# Altium PCB PCI Express_16765X11115_36PIN_Half length.PCBDOC (part 2 of 2)
Units mil, origin at the board's own origin, x right, y up, seen from the top; angles counter-clockwise.
Board outline 6725.36 x 2712.6 mil, 4 copper layers (TopLayer, InternalPlane1, InternalPlane2, BottomLayer); 107 components, 103 nets, 466 pads, 237 vias.
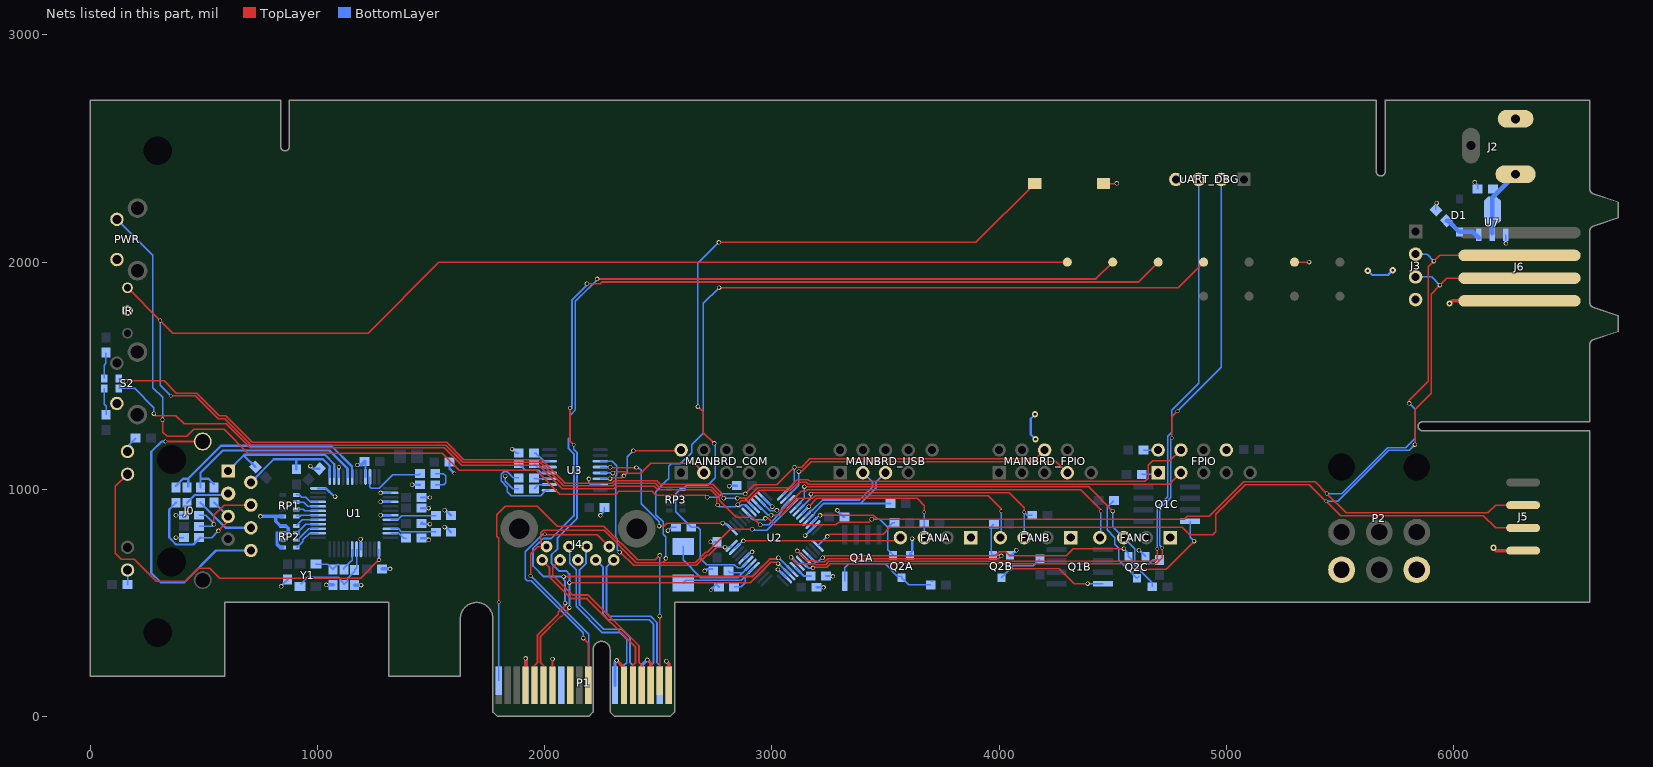
[diagram p4: the nets of this part, all layers, seen from the top]

## Via types
v1: diameter 19.68, hole 13.78, TopLayer to BottomLayer, tented both sides, 173 vias
v2: diameter 15.75, hole 11.81, TopLayer to BottomLayer, tented both sides, 33 vias
v3: diameter 29.53, hole 13.78, TopLayer to BottomLayer, tented both sides, 14 vias
v4: diameter 27.56, hole 11.81, TopLayer to BottomLayer, tented both sides, 8 vias
v5: diameter 27.56, hole 13.78, TopLayer to BottomLayer, tented both sides, 7 vias
v6: diameter 31.5, hole 13.78, TopLayer to BottomLayer, tented both sides, 1 vias
v7: diameter 23.62, hole 11.81, TopLayer to BottomLayer, tented both sides, 1 vias

## Nets (pads, with @x,y where several pads share a name; then routed paths per layer and width w, separated by ;. In a path a pad name is that pad's centre, name@x,y a point inside that pad or via, vN(x,y) a via of type N, cw(c..) or ccw(c..) an arc to the next point about the centre after c; other vN are vias at no path point) (continued)
GND: C3.1 C4.1 C5.1 C6.1 C8.2 C9.1 C11.1 C12.1 C13.1 C14.1 C15.1 C16.1 C17.1 C18.1 C19.1 C20.1 C21.1 C22.1 C24.1 C26.2 C27.2 C30.1 C34.1 C35.1 C36.1 C37.1 FANA.1 FANB.1 FANC.1 FPIO.8 IR.2 J2.2 J3.4 J4.7 J5.4 J6.4 P1.A4 P1.A12 P1.A15 P1.A18 P1.B4 P1.B7 P1.B13 P1.B16 P1.B18 P2.4 P2.6 PWR.2 Q2A.2 Q2B.2 Q2C.2 R8.2 R14.2 R15.2 RP1.5 RP2.5 RP2.6 RP2.7 RP2.8 S1.2 S2.2 TGND.1 U1.3 U1.9 U1.14 U1.16 U1.19 U1.29 U1.48 U2.8 U2.23 U2.35 U2.47 U3.15 U7.1 UART_DBG.4 | length 4029.6
  TopLayer w6: S1.2@4459.23,2345.94 4516.65,2345.94 v1(4517.65,2346.94) ; TGND.1@5300,2000 v1(5364,2000)
  TopLayer w10: P1.B7@2033.46,137.8 2033.46,252.46 v1(2034,253)
  TopLayer w15: P1.B4@1915.35,137.8 v1(1915.35,255.91) ; v1(2316,247) 2348.43,214.57 P1.B13@2348.43,137.8 ; v1(2451,249) 2466.54,233.46 P1.B16@2466.54,137.8 ; v1(2535,243) 2545.28,232.72 P1.B18@2545.28,137.8 ; v5(5982.38,1817.68) 5995.38,1830.68 J6.4@6070,1830.68 ; v5(6176,743) 6189,730 J5.4@6306.62,730
  BottomLayer w6: v1(375.76,787.4) C3.1@411.19,787.4 ; v1(375.76,885.83) C4.1@411.19,885.83 ; v1(1826,1058) 1826,1035 1859,1002 C34.1@1885.54,1002 ; v1(1856,1177) 1874,1159 C35.1@1885.54,1159 ; v1(2194,1046) 2194,1029 2201.98,1021.02 U3.15@2244.2,1021.02 ; v1(2245,885) 2262.46,902.46 C36.1@2262.46,920 ; v1(2542,818) 2557,833 C26.2@2577.54,833 ; v4@4156.22,1220 v4(4160,1220) ; v4@5733,1960.22 v4(5733,1964) ; C37.1@5922.34,2229.66 5922.34,2256.2 v1(5925.8,2259.66) ; v1(6093.65,2350.79) 6106.18,2338.25 C30.1@6106.18,2321.79 ; U7.1@6229.7,2119.92 6229.7,2083.73 v1(6230.65,2082.79)
  BottomLayer w10: v1(840,573) 840,575.54 C27.2@868,603.54 ; v1(968,1102) 979.34,1090.66 C19.1@1007.66,1090.66 ; U1.48@1001.97,1003.94 1037.06,1003.94 1073,968 v1(1077,968) ; U1.3@1092.52,1055.12 1092.52,1096.52 v1(1094,1098) ; v1(1189,780) 1189,739.11 1188.58,738.69 1191,736.28 U1.29@1190.94,736.22 ; C24.1@1206.69,1122.05 1210.63,1118.11 U1.9@1210.63,1055.12 ; v1(1277,886) 1320.69,886 U1.19@1320.87,885.83 ; v1(1277,945.06) U1.16@1320.69,945.06 ; v1(1277,984.43) U1.14@1320.69,984.43 ; v1(1416,1020) R15.2@1450.54,1020 ; R14.2@1456.46,785 1485,785 1489,781 v1(1489,777) ; C20.1@1456.46,849 1460.46,853 1466.46,847 v1(1494,847) ; C22.1@1456.46,917 v1(1488,917) ; C21.1@1456.46,964 v1(1494,964) ; v1(1559,834) 1564.46,834 C14.1@1587.46,811 ; v1(1559,908) 1564.46,908 C13.1@1587.46,885 ; C18.1@1580.46,1120 1580.46,1091.54 v2(1602,1070) ; v1(2704,641) 2708,641 2716,649 C8.2@2738.54,649 ; v1(2730,769) 2731.54,767.46 C12.1@2757,767.46 ; v2(2731,556) 2731,558.46 2754.54,582 C9.1@2766.54,570 ; v1(2812,1014) 2814,1016 C11.1@2844.54,1016 ; U2.8@2878.18,695.53 2878.18,696.18 2906.24,724.24 v1(2912.56,724.24) ; U2.23@2961.7,962.79 3000.49,924 v1(3001,924) ; v1(3026,647) 3026.94,647 U2.47@3061.92,612.02 ; v1(3146,796) 3146,796.32 U2.35@3187.2,837.51 ; C5.1@3195.46,569 3226,569 v1(3227,568) ; R8.2@3237.46,618 3267,618 v1(3268,617) ; v1(3288,907) 3288,905 3314,879 C6.1@3318.46,879 ; Q2A.2@3607.72,710.17 3614.53,710.17 3607.7,717 3617,726.3 v1(3617,783) ; Q2B.2@4047.41,710.22 4054.22,710.22 v1(4076.01,732.01) ; v4(4158,1330) 4139,1311 4139,1241 v4(4160,1220) ; v1(4615,732) 4617.61,732 Q2C.2@4643.4,706.21 ; v4(5623,1962) 5642,1943 5712,1943 v4(5733,1964)
  BottomLayer w15: v1(748,881) 748.24,880.76 816,880.76 ; RP2.5@846.47,744.76 834.24,744.76 821,758 821,776 ; RP2.6@846.47,776.25 846.22,776 821,776 ; RP1.5@846.47,880.76 816,880.76 ; v1(1038,579) 1038.54,579.54 C16.1@1068,579.54 ; C15.1@1163,578.54 1190.46,578.54 v1(1191,578) ; v1(1174,1107) 1191.65,1107 C24.1@1207.65,1123 ; C17.1@1283.46,649.61 v1(1318.9,649.61) ; P1.A4@1915.35,137.8 v1(1915.35,255.91) ; P1.A12@2309.06,137.8 2309.06,240.06 v1(2316,247) ; P1.A15@2427.17,137.8 2427.17,225.17 v1(2451,249) ; v1(2535,243) 2545.28,232.72 P1.A18@2545.28,137.8 ; 816,880.76 816,858.63 835.39,839.24 RP2.8@846.47,839.24 859.76,839.24 871,828 871,812 866.75,807.75 RP2.7@846.47,807.75 821.15,807.75 821,807.6 821,776
GPIO0: IR.1 TIR.1 U2.27 | length 7731.4
  TopLayer w6: IR.1@163,1887 v2(307,1743) 362,1688 1222,1688 1534,2000 TIR.1@4300,2000 ; v2(353,1412) 354,1411 462,1411 561.5,1311.5 591.5,1311.5 708,1195 1562.91,1195 1638.91,1119 1979,1119 2082.84,1015.16 2298.78,1015.16 2310.07,1026.45 2487.04,1026.45 2503.53,1009.96 2734.63,1009.96 2768,976.59 2768,953.04 2773,948.04 ; 2773,948 2842.96,878.04 2913.96,878.04 v1(2948,844)
  BottomLayer w6: v2(307,1743) 307,1458 v2(353,1412) ; v1(2948,844) 2984.65,844 3044,903.35 3044,917.03 U2.27@3075.84,948.87
I2C_SCL: P1.B5 TSMCLK.1 U2.45 | length 5478.9
  TopLayer w8: P1.B5@1954.72,137.8 1954.72,224.47 1967.41,237.16 1967.41,358.21 2059.1,449.9 2059.1,458.16 2089,488.06 v1(2089,499) ; v1(2083,616) 2912.2,616 2989.2,693 3022,693 v1(3028,699) ; v1(2230,1926) 4426,1926 TSMCLK.1@4500,2000
  BottomLayer w8: v1(2089,499) 2088.16,499.84 2088.16,597.22 2083,602.38 v1(2083,616) 1995,616 1948,663 1948,739.73 1973.64,765.36 1974.87,765.36 1993.13,783.62 2028.62,783.62 2128,883 2128,1156 2104,1180 2104,1222 2111,1229 2111,1326 2134,1349 2134,1826.94 2192.22,1885.16 2193.22,1885.16 2230,1921.94 v1(2230,1926) ; v1(3028,699) 3030.62,699 U2.45@3089.76,639.86
I2C_SDA: P1.B6 TSMDAT.1 U2.46 | length 5558.3
  TopLayer w8: P1.B6@1994.09,137.8 1994.09,224.47 1981.41,237.16 1981.41,352.41 2069,440 2073.24,440 2108,474.76 v1(2108,479) ; v1(2108,589) 2905,589 2995,679 3021,679 v1(3027,673) ; v1(2111,1358) 2111,1212 v2(2127,1196) ; v1(2185,1905) 2244,1905 2251,1912 4612,1912 TSMDAT.1@4700,2000
  BottomLayer w8: v1(2108,479) 2108.84,479.84 2108.84,588.16 v1(2108,589) 2108,627 2094,641 2061.17,641 2030,672.17 2030,713 2056,739 2056,787 2142,873 2142,1161.8 2127,1176.8 v2(2127,1196) ; v1(2111,1358) 2120,1367 2120,1834.8 2190.2,1905 v1(2185,1905) ; v1(3027,673) 3028.78,673 U2.46@3075.84,625.94
JTAG1: P1.B9
JTAG2: P1.A5
JTAG3: P1.A6
JTAG4: P1.A7
JTAG5: P1.A8
LED1: D4.2 FPIO.4 U2.20 | length 5127.9
  TopLayer w6: v1(156,1477) 324,1477 378,1423 467,1423 566.5,1323.5 596.5,1323.5 712.98,1207.02 1567.86,1207.02 1643.88,1131 1986.59,1131 2090.43,1027.16 2293.8,1027.16 2305.1,1038.45 2492.01,1038.45 2508.46,1022 2739.56,1022 2780,981.56 2780,967.68 v1(2786.84,960.84) ; v1(2848,960.84) 2848.16,961 2892.03,961 2938.03,1007 3076.16,1007 3112,1042.84 3158.37,1042.84 3166.74,1034.47 4641.47,1034.47 4656,1049 4656,1105 4676,1125 4752,1125 FPIO.4@4800,1173
  BottomLayer w6: D4.2@124,1488 135,1477 v1(156,1477) ; v1(2786.84,960.84) v1(2848,960.84) 2880.13,960.84 U2.20@2919.94,921.03
LED2: D5.2 FPIO.3 U2.19 | length 5076.4
  TopLayer w6: v1(279,1333) 287.16,1324.84 376.16,1324.84 413,1288 598.03,1288 703.03,1183 1557.94,1183 1633.94,1107 1973,1107 2076.84,1003.16 2303.75,1003.16 2315.04,1014.45 2482.07,1014.45 2498.56,997.96 2729.66,997.96 2756,971.62 2756,936 v1(2761,931) ; v1(2849,933) 2865,949 2897,949 2943,995 3081.13,995 3116.97,1030.84 3150.8,1030.84 3159.17,1022.47 4749.47,1022.47 FPIO.3@4800,1073
  BottomLayer w6: D5.2@124,1444 194,1444 279,1359 v1(279,1333) ; v1(2761,931) 2768.84,923.16 2839.16,923.16 v1(2849,933) ; 2849,923.16 2858.02,923.16 2865.86,931 2882.13,931 U2.19@2906.02,907.11
LINK: J0.10 U1.25 | length 1704
  TopLayer w6: J0.10@163.16,1066.34 110,1013.18 110,718 136,692 192,692 289,595 419.87,595 476.87,652 525.03,652 569.03,608 1189,608 v1(1270,689)
  BottomLayer w6: U1.25@1269.68,736.22 1269.68,689.32 v1(1270,689)
MBRXD: MAINBRD_COM.2 U3.14 | length 448.6
  TopLayer w6: v1(2287,1047) 2290.45,1050.45 2339.45,1050.45 v1(2348,1059) ; v1(2390,1170) 2597,1170 MAINBRD_COM.2@2600,1173
  BottomLayer w6: U3.14@2244.2,1046.61 2244.59,1047 v1(2287,1047) ; v1(2348,1059) 2363,1074 2363,1143 v1(2390,1170)
MBTXD: MAINBRD_COM.3 U3.13 | length 498
  TopLayer w6: v1(2298.82,1071.5) 2305.17,1077.84 2355.8,1077.84 2363.65,1070 2422,1070 2467,1115 2658,1115 MAINBRD_COM.3@2700,1073
  BottomLayer w6: U3.13@2244.2,1072.2 2298.12,1072.2 v1(2298.82,1071.5)
MCU_RST: C26.1 RP3.1 S1.1 U2.7 | length 3390
  TopLayer w6: v1(2674,1364) 2676,1364 2698,1342 2698,1250 v1(2746,1202) ; v1(2766,2087) 3897.14,2087 S1.1@4156.08,2345.94
  BottomLayer w6: v1(2674,1364) 2674,1996 2765,2087 v1(2766,2087) ; v1(2746,1202) 2750,1198 2750,1052 2716.86,1018.86 2624.14,1018.86 RP3.1@2606.53,1001.24 2596.75,1001.24 2575.5,980 2575.5,901.96 C26.1@2644.46,833 2673,833 2684,822 2684,697 2712,669 2834,669 2849,654 2864.49,654 U2.7@2892.1,681.61
NetC3_2: C3.2 J0.5 R6.1 R7.1 | length 588
  TopLayer w6: v1(562.76,816.93) 606.07,860.24 J0.5@606.07,880.71
  BottomLayer w6: C3.2@484.02,787.4 533.24,787.4 v1(562.76,816.93)
  BottomLayer w10: 375.76,757.93 346.23,787.45 346.23,911.42 R6.1@375.76,940.94 ; 376.91,756.72 453.34,756.72 C3.2@484.02,787.4 ; 452.76,757.93 452.76,757.87 453.91,756.72 ; R7.1@545.02,941.76 J0.5@606.07,880.71
NetC4_2: C4.2 J0.4 R5.1 | length 373.3
  TopLayer w6: v1(543.08,846.46) 543.08,885.83 587.96,930.71 J0.4@706.07,930.71
  BottomLayer w6: R5.1@478.12,836.61 533.24,836.61 v1(543.08,846.46) 543.08,849.92 507.17,885.83 C4.2@478.12,885.83
NetC8_1: C8.1 U2.6 Y2.1 | length 477.7
  BottomLayer w6: Y2.1@2609,748.71 2609,689 2687,611 2849.33,611 2870.33,632 ; C8.1@2808.46,640 2816.46,632 2870.33,632 ; U2.6@2906.02,667.69 2870.33,632
NetC9_2: C9.2 U2.5 Y2.2 | length 423.7
  BottomLayer w6: Y2.2@2620.71,599 2865.17,599 2883,616.83 ; C9.2@2833.46,570 2864,570 2883,589 2883,616.83 ; U2.5@2919.94,653.78 2883,616.83
  BottomLayer w10: Y2.2@2609,587.29 Y2.2@2620.71,599
NetC13_2: C13.2 U1.20 | length 207.5
  BottomLayer w6: U1.20@1320.87,866.14 1352.61,866.14 1370.47,884 1519.54,884 C13.2@1520.54,885
NetC14_2: C14.2 U1.22 | length 206.2
  BottomLayer w6: U1.22@1320.87,826.77 1356.23,826.77 1369,814 1517.54,814 C14.2@1520.54,811
NetC15_2: C15.2 R12.1 U1.30 Y1.1 | length 400
  BottomLayer w6: Y1.1@925,582 955,612 1089.6,612 1115,586.6 R12.1@1115,579.54 1130,594.54 1130,607.4 1163,640.4 C15.2@1163,645.46 1171.26,653.72 U1.30@1171.26,736.22
NetC16_2: C16.2 R12.2 U1.31 Y1.3 | length 232.6
  BottomLayer w6: Y1.3@992,672 993.84,670.16 1044.31,670.16 C16.2@1068,646.46 1068,650 1083.16,665.16 1083.8,665.16 1089,670.35 1094.2,665.16 1095,665.16 ; R12.2@1115,646.46 1115,651.53 1139.59,676.12 1151.57,688.11 U1.31@1151.57,736.22
NetC30_2: C30.2 J2.1 U7.2 | length 301.7
  BottomLayer w20: U7.2@6170.65,2127.8 U7.2@6170.65,2226.22 6170.65,2284.17 J2.1@6273.43,2386.95
NetC32_1: C32.1 U3.1 | length 383.4
  BottomLayer w6: C32.1@1885.54,1050 1860.65,1050 1833.8,1076.84 1818.2,1076.84 1807.16,1065.8 1807.16,1036.87 1835.16,1008.87 1835.16,989.84 1853,972 1981,972 2004.43,995.43 U3.1@2019.8,995.43
NetC32_2: C32.2 U3.3 | length 68.7
  BottomLayer w6: C32.2@1952.46,1050 1955.85,1046.61 U3.3@2019.8,1046.61
NetC33_1: C33.1 U3.4 | length 152.1
  BottomLayer w6: C33.1@1885.54,1113 1885.54,1111.46 1914,1083 1973.53,1083 1984.33,1072.2 U3.4@2019.8,1072.2
NetC33_2: C33.2 U3.5 | length 73.6
  BottomLayer w6: C33.2@1952.46,1113 1967.67,1097.8 U3.5@2019.8,1097.8
NetC34_2: C34.2 U3.2 | length 75.2
  BottomLayer w6: C34.2@1952.46,1002 1971.49,1021.02 U3.2@2019.8,1021.02
NetC35_2: C35.2 U3.6 | length 82.9
  BottomLayer w6: C35.2@1952.46,1159 1960.53,1159 1994.73,1124.8 1994.73,1123.39 U3.6@2019.8,1123.39
NetC37_2: C37.2 D1.1 U7.3 | length 172.3
  BottomLayer w20: C37.2@5969.66,2182.34 5976.26,2182.34 D1.1@6025.65,2132.95 6084.48,2132.95 U7.3@6110.65,2106.79
NetD4_1: D4.1 R20.1 | length 116.8
  BottomLayer w6: D4.1@60,1488 60,1547 68,1555 R20.1@68,1601.54
NetD5_1: D5.1 R19.1 | length 119.3
  BottomLayer w6: D5.1@60,1444 60,1375 69,1366 R19.1@69,1328.46
NetFPIO_1: FPIO.1 R16.1 | length 74.9
  BottomLayer w6: R16.1@4627.88,1066.17 4693.17,1066.17 FPIO.1@4700,1073
NetFPIO_2: FPIO.2 R17.1 | length 65.5
  BottomLayer w6: R17.1@4634.88,1172.17 4699.17,1172.17 FPIO.2@4700,1173
NetJ0_8: J0.8 J0.13 | length 1291
  TopLayer w10: v2(329.96,1210.43) J0.13@493.87,1210.43
  BottomLayer w10: v2(329.96,1210.43) 313.43,1210.43 268,1165 268,632 309.45,590.55 412.59,590.55 552.75,730.71 J0.8@706.07,730.71
NetJ0_9: J0.9 R2.1 | length 74
  BottomLayer w6: J0.9@163.16,1166.34 163.16,1190 R2.1@198.74,1225.58
NetJ0_12: J0.12 R1.1 | length 64.3
  BottomLayer w6: R1.1@162.26,580.76 163.16,581.66 J0.12@163.16,644.68
NetQ1A_1: Q1A.G Q2A.3 R38A.2 | length 495.3
  BottomLayer w6: Q1A.G@3321,595.64 3321,654 3338.24,671.24 3497.76,671.24 3551.32,617.68 3570.32,617.68 Q2A.3@3570.32,611.75 3603.06,579 R38A.2@3698.54,579 ; R38A.2@3698.54,595.29 R38A.2@3709.11,595.29
NetQ1B_1: Q1B.G Q2B.3 R38B.2 | length 638
  TopLayer w6: v1(4049,650.79) 4264.21,650.79 4330,585 v1(4389,585)
  BottomLayer w6: Q2B.3@4010.01,611.8 v1(4049,650.79) 4061.57,663.36 4149.9,663.36 R38B.2@4179.01,692.47 ; v1(4389,585) Q1B.G@4457.36,585
NetQ1C_1: Q1C.G Q2C.3 R38C.2 | length 861.1
  TopLayer w6: v1(4587,646) 4590,649 4735,649 v1(4858,772)
  BottomLayer w6: R38C.2@4504.83,950.46 4475,920.63 4475,822 4509.5,787.5 4509.5,757.95 4527,740.45 4527,686.79 4587,626.79 ; v1(4587,646) 4587,626.79 ; Q2C.3@4616,617.79 Q2C.3@4606,607.79 4587,626.79 ; Q1C.G@4840.36,860 4840.36,789.64 v1(4858,772)
NetR8_1: R8.1 U2.44 | length 81.7
  BottomLayer w10: U2.44@3103.68,653.78 3139.45,618 R8.1@3170.54,618
NetR13_1: R13.1 U1.10 | length 294.1
  BottomLayer w6: U1.10@1230.32,1055.12 1230.32,1010.68 1236,1005 1271,1005 1330.16,1064.16 1445.6,1064.16 R13.1@1450.9,1069.46
NetR13_2: R13.2 R15.1 | length 128.8
  BottomLayer w6: R15.1@1517.46,1020 1554,1020 1563,1029 1563,1059 1552.54,1069.46 R13.2@1517.82,1069.46
NetR14_1: R14.1 U1.23 | length 77.8
  BottomLayer w6: U1.23@1320.87,807.09 1356.91,807.09 1379,785 R14.1@1389.54,785
NetRP1_1: RP1.1 U1.45 | length 109
  BottomLayer w6: RP1.1@905.53,975.24 RP1.1@918.16,975.24 ; RP1.1@918.16,975.2 929.2,964.16 948.01,964.16 967.29,944.88 U1.45@1001.97,944.88
NetRP1_2: RP1.2 U1.44 | length 104.1
  BottomLayer w6: RP1.2@905.53,943.75 938.25,943.75 956.8,925.2 U1.44@1001.97,925.2
NetRP1_3: RP1.3 U1.43 | length 99.2
  BottomLayer w6: RP1.3@905.53,912.25 937.26,912.25 944,905.51 U1.43@1001.97,905.51
NetRP1_4: RP1.4 U1.42 | length 98.5
  BottomLayer w6: RP1.4@905.53,880.76 923.76,880.76 928.83,885.83 U1.42@1001.97,885.83
NetRP2_1: RP2.1 U1.41 | length 107.6
  BottomLayer w6: RP2.1@905.53,839.24 906.24,839.24 933.14,866.14 U1.41@1001.97,866.14
NetRP2_2: RP2.2 U1.40 | length 112.5
  BottomLayer w6: RP2.2@905.53,807.75 909.4,807.75 948.11,846.46 U1.40@1001.97,846.46
NetRP2_3: RP2.3 U1.39 | length 117.4
  BottomLayer w6: RP2.3@905.53,776.25 909.4,776.25 959.92,826.77 U1.39@1001.97,826.77
NetRP2_4: RP2.4 U1.38 | length 126.9
  BottomLayer w6: RP2.4@905.53,744.76 909.76,744.76 934,769 934,777 964.09,807.09 U1.38@1001.97,807.09
PER0_N: J4.9 P1.A17 | length 766.6
  BottomLayer w8.25: J4.9@2303.15,688.98 2271.33,657.16 2271.33,455.67 2286,441 2465.35,441 2493.77,412.58 2493.77,236.73 2505.91,224.6 P1.A17@2505.91,137.8
PER0_P: J4.8 P1.A16 | length 766.6
  BottomLayer w8.25: J4.8@2224.41,688.98 2256.23,657.16 2256.23,449.42 2279.75,425.9 2459.1,425.9 2478.67,406.33 2478.67,236.73 2466.54,224.6 P1.A16@2466.54,137.8
PERST: J4.4 P1.A11 TPERST.1 U2.28 | length 5672.2
  TopLayer w6: v2(1937,619) 1937,716 1969.03,748.03 J4.4@1999,748.03 ; J4.4@2007.87,748.03 J4.4@1999,748.03 ; v1(2533,696) 2533,690 2520,677 ; v1(2767,1888) 4788,1888 TPERST.1@4900,2000 ; v1(2913,824) 2817,824 2715.84,722.84 2708.22,722.84 2662.38,677 2520,677 ; J4.4@1999,748.03 1982.13,764.91 1982.13,808.99 1992.01,818.87 2236,818.87 2261.54,818.87 2403.41,677 2520,677
  BottomLayer w6: v2(1937,619) 2193,363 2193,314 ; v1(2533,696) 2533,792 2521.84,803.16 2521.84,856.16 2489,889 2489,990.22 2533.26,1034.47 2545,1046.22 2545,1100.53 2556,1111.53 2596.53,1111.53 2647,1162 2647,1196 2698,1247 2698,1819 v1(2767,1888) ; v1(2913,824) 2916.84,820.16 2977.78,820.16 3089.76,932.14 U2.28@3089.76,934.95
  BottomLayer w8: P1.A11@2190.94,137.8 2193,139.85 2193,314
PET0_N: J4.6 P1.B15 | length 766.7
  TopLayer w8.25: J4.6@2066.93,688.98 2035.11,657.16 2035.11,622 2123.11,534 2191.35,534 2415.03,310.32 2415.03,236.73 2427.17,224.6 P1.B15@2427.17,137.8
PET0_P: J4.5 P1.B14 | length 766.7
  TopLayer w8.25: J4.5@1988.19,688.98 2020.01,657.16 2020.01,615.75 2116.85,518.9 2185.1,518.9 2399.93,304.07 2399.93,236.73 2387.8,224.6 P1.B14@2387.8,137.8
PRSNT1#: P1.A1 P1.B17 | length 2127.2
  TopLayer w6: v2(1797.24,503) 1797.24,783.76 1788,793 1788,887.06 1825.97,925.03 1966.97,925.03 2054.28,837.72 2259.67,837.72 2408.38,689 2486,689 v1(2506,709)
  TopLayer w8: P1.B17@2505.91,157.48 v1(2505.91,442)
  BottomLayer w6: P1.A1@1797.24,157.48 v2(1797.24,503)
  BottomLayer w8: v1(2505.91,442) 2503,444.91 2506,447.91 v1(2506,709)
PWMA: FANA.4 U2.11 | length 726.2
  TopLayer w6: v1(2874,773) FANA.4@3547.8,773
  BottomLayer w6: U2.11@2836.43,737.29 2872.13,773 v1(2874,773)
PWMB: FANB.4 U2.21 | length 1282.7
  TopLayer w6: v1(2996,886) 3040,886 3114.16,960.16 3178.8,960.16 3190.65,972 3952,972 4010.04,913.96 v2(4010.04,903.01)
  BottomLayer w6: U2.21@2933.86,934.95 2934.7,934.95 2983.65,886 v1(2996,886) ; FANB.4@4010.04,787.41 v2(4010.04,903.01)
PWMC: FANC.4 U2.22 | length 1716.4
  TopLayer w6: v1(3021,907) 3044.03,907 3128.03,991 3148.65,991 3155.49,997.84 4360.16,997.84 4448.03,909.97 v2(4448.03,903)
  BottomLayer w6: U2.22@2947.78,948.87 2948.63,949.72 2993.2,905.16 3019.16,905.16 v1(3021,907) ; FANC.4@4448.03,787.4 v2(4448.03,903)
PWR_SW_P: MAINBRD_FPIO.6 PWR.1 U2.25 | length 5281.9
  TopLayer w6: v1(317,1306) 319.16,1303.84 319.16,1252.2 337.35,1234 424,1234 454,1264 588.09,1264 693.09,1159 1548,1159 1624,1083 1962.03,1083 2065.87,979.16 2313.69,979.16 2324.98,990.45 2472.13,990.45 2488.62,973.96 2706.04,973.96 v1(2715,965) ; v1(2882,980) 2921,1019 3021,1019 v1(3099,1097) 3130.03,1097 3167.03,1134 4161,1134 MAINBRD_FPIO.6@4200,1173
  BottomLayer w6: PWR.1@116.45,2188.58 275,2030.03 275,1447 317,1405 v1(317,1306) ; v1(2715,965) 2764.35,965 2779.04,979.68 2779.68,979.68 2780,980 v1(2882,980) ; U2.25@3048,976.71 3099,1027.7 v1(3099,1097)
REFCLK_N: J4.2 P1.A14 | length 766.3
  BottomLayer w8.25: J4.2@2185.04,748.03 2181.38,744.38 2181.38,674.18 2153.22,646.02 2153.22,490.78 2260,384 2338,384 2375.66,346.34 2375.66,236.73 2387.8,224.6 P1.A14@2387.8,137.8
REFCLK_P: J4.3 P1.A13 | length 766.3
  BottomLayer w8.25: J4.3@2106.3,748.03 2109.95,744.38 2109.95,674.18 2138.12,646.02 2138.12,484.53 2253.75,368.9 2331.75,368.9 2360.56,340.08 2360.56,236.73 2348.43,224.6 P1.A13@2348.43,137.8
RST_SW_P: MAINBRD_FPIO.7 U2.26 | length 1359
  TopLayer w6: v1(3118,1078) 3128,1078 3172,1122 4251,1122 MAINBRD_FPIO.7@4300,1073
  BottomLayer w6: U2.26@3061.92,962.79 3118,1018.87 v1(3118,1078)
RX_N: C2.1 R7.2 U1.5 | length 892
  BottomLayer w10: C2.1@484.02,1007.87 484.02,1047 ; R7.2@543.08,1022.92 519,1047 484.02,1047 ; U1.5@1131.89,1055.12 1131.89,1091.35 1051.98,1171.26 582.45,1171.26 484.02,1072.83 484.02,1047
RX_P: C1.1 R6.2 U1.6 | length 965.8
  BottomLayer w10: R6.2@375.76,1014.76 408.06,1047.06 429.97,1047.06 ; C1.1@429.97,1012.87 429.97,1047.06 ; U1.6@1151.57,1055.12 1151.57,1099.95 1060.26,1191.26 574.16,1191.26 429.97,1047.06
RXD1: U2.43 UART_DBG.3 | length 3431.7
  TopLayer w6: v1(3084,701) 3112.16,672.84 3187.8,672.84 3192.49,668.16 3235.78,668.16 3250.85,683.24 4686.24,683.24 4696,693 v2(4696,739) ; UART_DBG.3@4876.72,2364 UART_DBG.3@4877.92,2364
  BottomLayer w6: v1(3084,701) 3084.29,701 U2.43@3117.6,667.69 ; v2(4696,739) 4695,740 4695,920 4742.51,967.51 4742.51,1233.49 4760,1250.97 4760,1349 4877.92,1466.92 UART_DBG.3@4877.92,2364
RXD2: U2.13 U3.12 | length 804
  TopLayer w6: v1(2288,1097) 2289,1096 v1(2403,1096) ; v1(2503,838) 2524,838 2537,851 v1(2783,851)
  BottomLayer w6: U3.12@2244.2,1097.8 2245,1097 v1(2288,1097) ; v1(2403,1096) 2412,1096 2424.63,1083.37 2424.63,936.12 2503,857.75 v1(2503,838) ; v1(2783,851) 2795.1,851 U2.13@2822.51,823.59 U2.13@2825,821.1
RXIN_N: C2.2 J0.6 | length 267.7
  BottomLayer w10: C2.2@484.02,940.94 594.26,830.71 J0.6@706.07,830.71
RXIN_P: C1.2 J0.3 | length 200.8
  BottomLayer w10: C1.2@424.97,940.94 459.24,975.22 606.07,975.22 J0.3@606.07,980.71
SENA: FANA.3 R10A.1 U2.31 | length 721
  TopLayer w6: v1(3162,924) 3198,960 3639,960 3670.32,928.68 v2(3670.32,898.96)
  BottomLayer w6: U2.31@3131.52,893.19 3162,923.67 v1(3162,924) ; FANA.3@3670.35,787.36 v2@3670.35,898.93
SENB: FANB.3 R10B.1 U2.30 | length 1236.1
  TopLayer w6: v1(3171,979) 3171,981 3174,984 4045,984 4110.01,918.99 v2(4110.01,899.01)
  BottomLayer w6: U2.30@3117.6,907.11 3171,960.51 v1(3171,979) ; FANB.3@4110.04,787.41 v2(4110.01,899.01) 4124.02,885 R10B.1@4145.54,885
SENC: FANC.3 R10C.1 U2.29 | length 1890.2
  TopLayer w6: v1(3143,1012) 3144.53,1010.47 4393.53,1010.47 v1(4500,904)
  BottomLayer w6: U2.29@3103.68,921.03 3143,960.35 v1(3143,1012) ; v1(4500,904) 4500,835.43 FANC.3@4548.03,787.4 4596.16,739.28 4596.16,683.2 4607.2,672.16 4661.47,672.16 4678.23,688.91 R10C.1@4705.24,688.91
STM32F1_SWCLK: J3.3 J5.3 J6.3 U2.37 | length 5093.8
  TopLayer w6: v1(3244,793) 3254,803 3489,803 3518,832 4807,832 4839.84,799.16 4940.16,799.16 4954,813 4954,891 5084,1021 5366,1021 5503,884 6131.62,884 6185.62,830 J5.3@6306.62,830 ; v1(5830,1197) 5830.7,1197.7 5830.7,1351.7 5901,1422 5901,1859.68 v1(5940,1898.68) 5971,1929.68 J6.3@6290.36,1929.68
  BottomLayer w6: U2.37@3201.12,751.21 3242.9,793 v1(3244,793) ; v2(5440,948) 5490.97,948 5714.97,1172 5805,1172 v1(5830,1197) ; J3.3@5833,1935 5903,1935 ; 5904,1934.68 v1(5940,1898.68)
STM32F1_SWDIO: J3.2 J5.2 J6.2 U2.34 | length 5099.4
  TopLayer w6: v1(3212,885) 3213.84,886.84 3446.8,886.84 3464.65,869 4815,869 4826.84,880.84 4924.84,880.84 5077,1033 5390.44,1033 v2(5442,981.44) 5527.44,896 6151.62,896 6185.62,930 J5.2@6306.62,930 ; v1(5805,1378) 5805,1392 5889,1476 5889,1979.68 v1(5914,2004.68) 5939,2029.68 J6.2@6290.36,2029.68
  BottomLayer w6: U2.34@3173.28,851.43 3173.43,851.43 3208,886 3211,886 v1(3212,885) ; v2(5442,981.44) 5507.44,981.44 5710,1184 5790,1184 5830.7,1224.7 5830.7,1352.3 v1(5805,1378) ; J3.2@5833,2035 5883,2035 ; 5884,2034.68 v1(5914,2004.68)
TIM3_CH1: Q2C.1 R39C.2 U2.40 | length 1688.7
  TopLayer w6: v1(3223,699) 3231.24,707.24 3982.65,707.24 4001.26,725.84 4028.8,725.84 4047.41,707.24 4295.24,707.24 4327,739 v1(4549,739)
  BottomLayer w6: U2.40@3178,693 3161.55,709.45 U2.40@3159.36,709.45 3190.81,678 3199.62,678 3220.62,699 v1(3223,699) ; v1(4549,739) 4568.6,719.4 Q2C.1@4568.6,706.21 4584.16,690.65 4584.16,678.22 4626.89,635.49 4627.44,635.49 4632.72,630.22 4632.72,629.67 4673.54,588.85 R39C.2@4673.54,571
TIM3_CH2: Q2B.1 R39B.2 U2.41 | length 1160.2
  TopLayer w6: v1(3111,729) 3155.16,684.84 3192.78,684.84 3197.46,680.16 3230.8,680.16 3245.88,695.24 3997.3,695.24 v1(4009.06,707)
  BottomLayer w6: v1(3111,729) 3144.47,695.53 U2.41@3145.44,695.53 ; R39B.2@3976.57,847 3965,835.43 3965,717.83 Q2B.1@3972.61,710.22 4005.84,710.22 v1(4009.06,707)
TIM3_CH3: Q2A.1 R39A.2 U2.18 | length 837.6
  TopLayer w6: v1(2971,872) 2983.35,872 3012.35,843 3280,843 3293,856 3427,856 v1(3439,868)
  BottomLayer w6: U2.18@2892.1,893.19 2918.29,867 2966,867 v1(2971,872) ; v1(3439,868) 3474,868 3510,832 ; Q2A.1@3532.91,710.17 3510,733.09 3510,832 ; R39A.2@3539.54,853 3531,853 3510,832
TX_N: J0.2 R3.1 U1.1 | length 493.5
  BottomLayer w10: J0.2@706.07,1030.71 807.25,1131.89 910,1131.89 ; R3.1@906,1088.46 906,1127.89 910,1131.89 ; U1.1@1053.15,1055.12 1053.15,1095.55 1053.15,1102.36 1023.62,1131.89 910,1131.89
TX_P: J0.1 R4.1 U1.2 | length 645.3
  BottomLayer w10: J0.1@606.07,1080.71 677.25,1151.89 677.25,1146.93 ; R4.1@726.11,1098.07 677.25,1146.93 ; U1.2@1073.15,1055.12 1073.15,1087.27 1073.15,1110.65 1031.91,1151.89 682.21,1151.89 677.25,1146.93
TXD1: U2.42 UART_DBG.2 | length 3417
  TopLayer w6: v1(3180,654) 3182.16,656.16 3240.75,656.16 3255.82,671.24 4691.24,671.24 4718,698 v2(4718,743) ; v2(4760,1226) 4760,1319 v2(4785,1344) ; UART_DBG.2@4977.92,2348.2 UART_DBG.2@4977.92,2364
  BottomLayer w6: U2.42@3131.52,681.61 3161.13,652 3178,652 v1(3180,654) ; v2(4718,743) 4717,743 4707,753 4707,915.03 4754.51,962.54 4754.51,1220.51 v2(4760,1226) ; v2(4785,1344) 4977.92,1536.92 UART_DBG.2@4977.92,2364
TXD2: U2.12 U3.11 | length 1024.7
  TopLayer w6: v1(2329,723) 2330,724 2333,724 2392,665 2667.35,665 2713.2,710.84 2720.84,710.84 2756,746 v1(2793,746)
  BottomLayer w6: U3.11@2244.2,1123.39 2297,1123.39 2317.67,1102.72 2317.67,1063.7 2312.65,1058.68 2312.65,788.8 2319,782.45 2319,733 v1(2329,723) ; v1(2793,746) 2817.3,746 U2.12@2822.51,751.21
USB0_N: MAINBRD_USB.3 U2.32 | length 431.7
  BottomLayer w8: U2.32@3145.44,879.27 3173.32,907.15 3176.74,907.15 3222.63,953.04 3248.85,953.04 3248.89,953 3385.1,953 3442.58,1010.47 3442.58,1030.42 MAINBRD_USB.3@3400,1073
USB0_P: MAINBRD_USB.5 R9.1 U2.33 | length 574.7
  BottomLayer w8: U2.33@3159.36,865.35 3187.24,893.23 3187.24,896.65 3228.74,938.15 3391.25,938.15 ; MAINBRD_USB.5@3500,1073 3457.43,1030.42 3457.43,1004.32 3391.25,938.15 ; R9.1@3521.54,937 3520.39,938.15 3391.25,938.15
WAKE#: J4.1 P1.B11 | length 1135.1
  TopLayer w6: v2(1999,802) 2000.97,800.03 2231.46,800.03 J4.1@2283.46,748.03 ; v1(2169,345) 2190.94,323.06 P1.B11@2190.94,137.8
  BottomLayer w6: v2(1999,802) 1991.89,802 1914,724.11 1914,606 1923,597 1940,597 2169,368 v1(2169,345)
pads on no net: D1.0 FPIO.5 FPIO.7 FPIO.9 J0.7 J0.14 J0.MH1 J0.MH2 J2.3 J3.1 J4.10 MAINBRD_COM.1 MAINBRD_COM.4 MAINBRD_COM.5 MAINBRD_COM.6 MAINBRD_COM.7 MAINBRD_COM.8 MAINBRD_COM.9 MAINBRD_FPIO.1 MAINBRD_FPIO.2 MAINBRD_FPIO.3 MAINBRD_FPIO.4 MAINBRD_FPIO.5 MAINBRD_FPIO.8 MAINBRD_FPIO.9 MAINBRD_USB.1 MAINBRD_USB.2 MAINBRD_USB.4 MAINBRD_USB.6 MAINBRD_USB.7 MAINBRD_USB.8 MAINBRD_USB.10 P1.B12 P2.0 P2.5 PWR.0 S2.0 U1.7 U1.12 U1.13 U1.18 U1.24 U1.26 U1.46 U1.47 U2.2 U2.38 U3.7 U3.8 U3.9 U3.10 UART_DBG.1 Y1.2 Y1.4

## Polygon pours and split planes (outlines as drawn)
GND on InternalPlane1 (split plane): 1476 vertices, not listed, extent 15.07,192.24 6710.29,2697.53
+12V_ADD on InternalPlane2 (split plane): 4495.65,1031.65 4497.22,1030.45 4499.04,1029.69 4501,1029.44 4807.87,1029.44 4943.65,893.65 4945.22,892.45 4947.04,891.69 4949,891.44 5904.87,891.44 5926.44,869.87 5926.44,755.13 5903.87,732.56 4888,732.56 4886.04,732.31 4884.22,731.55 4882.65,730.35 4839.87,687.56 4743,687.56 4741.04,687.31 4739.22,686.55 4737.65,685.35 4608.87,556.56 4351.13,556.56 4339.35,568.35 4337.78,569.55 4335.96,570.31 4334,570.56 3340.13,570.56 3319.35,591.35 3293.56,617.13 3293.56,674.87 3306.37,687.67 4290.24,687.67 4292.19,687.93 4294.02,688.68 4295.59,689.89 4344.35,738.65 4415.35,809.65 4416.55,811.22 4417.31,813.04 4417.56,815 4417.56,895 4417.56,1025.87 4433.13,1041.44 4485.87,1041.44
+3.3V on InternalPlane2 (split plane): 1476 vertices, not listed, extent 15.07,192.24 6710.29,2697.53

## Keep-outs
TopLayer:
  rectangle: 718.5,1258 836.61,1656
  rectangle: 0,2303.15 500,2712.6
  rectangle: 492.13,2673.23 5399.61,2712.6
  rectangle: 6400.39,541.34 6600.39,1257.87
  rectangle: 2570.87,501.97 6600.39,541.34
  rectangle: 2775.59,1218.5 3523.62,1257.87
  rectangle: 5871,1139.76 6400.39,1257.87
  rectangle: 4803.15,1218.5 5787,1257.87
  rectangle: 4183.07,1218.5 4714.57,1257.87
  rectangle: 3612.2,1218.5 4084.65,1257.87
  rectangle: 718.5,1726 836.61,2704.72
  region: 1102.36,1257.87 718.5,1257.87 718.5,1218.5 1102.36,1218.5
  region: 2637.8,1257.87 2155.51,1257.87 2155.51,1218.5 2637.8,1218.5
  region: 2069,1257.87 1757,1257.87 1757,1218.5 2069,1218.5
  region: 1683,1257.87 1181.1,1257.87 1181.1,1218.5 1683,1218.5
  region: 0,175.18 590.55,175.18 ccw(c590.55,177.17) 592.53,177.17 592.53,499.99 1311.01,499.99 1311.01,312.99 ccw(c1312.99,312.99) 1312.99,311.01 1627.95,311.01 ccw(c1627.95,312.99) 1629.94,312.99 ccw(c1627.95,312.99) 1629.94,313.01 1629.94,430.12 cw(c1699.8,430.12) 1769.67,430.12 ccw(c1771.65,430.12) 1773.64,430.12 1773.64,541.34 ccw(c1771.65,541.34) 1771.65,543.32 0,543.32 ccw(c0,541.34) -1.98,541.34 -1.98,177.17 ccw(c0,177.17)
BottomLayer:
  rectangle: 718.5,1258 836.61,1656
  rectangle: 0,541.34 39.37,2303.15
  rectangle: 0,2303.15 500,2712.6
  rectangle: 2570.87,501.97 6600.39,541.34
  rectangle: 6400.39,541.34 6600.39,1257.87
  rectangle: 492.13,2673.23 5399.61,2712.6
  rectangle: 2775.59,1218.5 3523.62,1257.87
  rectangle: 5871,1139.76 6400.39,1257.87
  rectangle: 4803.15,1218.5 5787,1257.87
  rectangle: 4183.07,1218.5 4714.57,1257.87
  rectangle: 3612.2,1218.5 4084.65,1257.87
  rectangle: 718.5,1727 836.61,2704.72
  region: 1102.36,1257.87 718.5,1257.87 718.5,1218.5 1102.36,1218.5
  region: 2637.8,1257.87 2155.51,1257.87 2155.51,1218.5 2637.8,1218.5
  region: 2069,1257.87 1757,1257.87 1757,1218.5 2069,1218.5
  region: 1683,1257.87 1181.1,1257.87 1181.1,1218.5 1683,1218.5
  region: 0,175.18 590.55,175.18 ccw(c590.55,177.17) 592.53,177.17 592.53,499.99 1311.01,499.99 1311.01,312.99 ccw(c1312.99,312.99) 1312.99,311.01 1627.95,311.01 ccw(c1627.95,312.99) 1629.94,312.99 ccw(c1627.95,312.99) 1629.94,313.01 1629.94,430.12 cw(c1699.8,430.12) 1769.67,430.12 ccw(c1771.65,430.12) 1773.64,430.12 1773.64,541.34 ccw(c1771.65,541.34) 1771.65,543.32 0,543.32 ccw(c0,541.34) -1.98,541.34 -1.98,177.17 ccw(c0,177.17)
KeepOutLayer:
  rectangle: 1312.99,177.17 1627.95,312.99
  lines w3.94: 0,177.17 590.55,177.17 590.55,501.97 1312.99,501.97 1312.99,177.17 1627.95,177.17 1627.95,430.12 cw(c1699.8,430.12) 1771.65,430.12 1771.65,19.68 1791.34,0 2192.91,0 2212.6,19.68 2212.6,293.31 cw(c2250,293.31) 2287.4,293.31 2287.4,19.68 2307.09,0 2551.18,0 2570.87,19.68 2570.87,501.97 6600.39,501.97 6600.39,1257.87 5864,1257.87 cw(c5864,1277.56) 5864,1297.24 6600.39,1297.24 6600.39,1638.84 cw(c6620.08,1638.84) 6613.85,1657.51 6725.36,1694.68 6725.36,1764.68 6613.85,1801.85 cw(c6620.08,1820.53) 6600.39,1820.53 6600.39,2138.84 cw(c6620.08,2138.84) 6613.85,2157.51 6725.36,2194.68 6725.36,2264.68 6613.85,2301.85 cw(c6620.08,2320.53) 6600.39,2320.53 6600.39,2712.6 5699.37,2712.6 5699.37,2398.9 cw(c5679.68,2398.9) 5660,2398.9 5660,2712.6 875.98,2712.6 875.98,2509.84 cw(c856.3,2509.84) 836.61,2509.84 836.61,2712.6 0,2712.6 0,1257.87 0,177.17 ; 836.61,1277.56 ccw(c856.3,1277.56) 856.3,1257.87 1112.2,1257.87 ccw(c1112.2,1277.56) 1112.2,1297.24 875.98,1297.24 875.98,1653.54 ccw(c856.3,1653.54) 836.61,1653.54 836.61,1277.56 ; 836.61,1722.44 ccw(c856.3,1722.44) 875.98,1722.44 875.98,2194.88 ccw(c856.3,2194.88) 836.61,2194.88 836.61,1722.44 ; 836.61,2263.78 ccw(c856.3,2263.78) 875.98,2263.78 875.98,2440.94 ccw(c856.3,2440.94) 836.61,2440.94 836.61,2263.78 ; 1181.1,1257.87 cw(c1181.1,1277.56) 1181.1,1297.24 1684.1,1297.24 cw(c1684.1,1277.56) 1684.1,1257.87 1181.1,1257.87 ; 1753,1257.87 cw(c1753,1277.56) 1753,1297.24 2076.77,1297.24 cw(c2076.77,1277.56) 2076.77,1257.87 1753,1257.87 ; 2145.67,1257.87 cw(c2145.67,1277.56) 2145.67,1297.24 2647.64,1297.24 cw(c2647.64,1277.56) 2647.64,1257.87 2145.67,1257.87 ; 2746.06,1257.87 cw(c2746.06,1277.56) 2746.06,1297.24 3533.46,1297.24 cw(c3533.46,1277.56) 3533.46,1257.87 2746.06,1257.87 ; 3602.36,1257.87 cw(c3602.36,1277.56) 3602.36,1297.24 4104.33,1297.24 cw(c4104.33,1277.56) 4104.33,1257.87 3602.36,1257.87 ; 4173.23,1257.87 cw(c4173.23,1277.56) 4173.23,1297.24 4724.41,1297.24 cw(c4724.41,1277.56) 4724.41,1257.87 4173.23,1257.87 ; 4793.31,1257.87 cw(c4793.31,1277.56) 4793.31,1297.24 5403.54,1297.24 5472.44,1297.24 5660,1297.24 5660,1471 cw(c5679.68,1471) 5699.37,1471 5699.37,1297.24 5795.1,1297.24 cw(c5795.1,1277.56) 5795.1,1257.87 5472.44,1257.87 5403.54,1257.87 4793.31,1257.87 ; 5660,1585 ccw(c5679.68,1585) 5699.37,1585 5699.37,1910 ccw(c5679.68,1910) 5660,1910 5660,1585 ; 5660,1978.9 ccw(c5679.68,1978.9) 5699.37,1978.9 5699.37,2330 ccw(c5679.68,2330) 5660,2330 5660,1978.9

## Other copper
TopLayer:
  text "1" at 284,2085 h100
BottomLayer:
  text "4" at 620,2085 h100
  text "IPMI_TU Rev 1.1" at 6333,1161 h40 r90
InternalPlane1 (plane layer: these items are gaps in the copper):
  rectangle: 1761.81,-9.84 2580.71,225.39
  rectangle: 1312.99,177.17 1627.95,312.99
  text "2" at 360,2085 h100
InternalPlane2 (plane layer: these items are gaps in the copper):
  rectangle: 1761.81,-9.84 2580.71,225.39
  rectangle: 1312.99,177.17 1627.95,312.99
  lines w15: 3933,695.24 4290.24,695.24 4339,744 4410,815 4410,895 4410,1029 4430,1049 4489,1049 4501,1037 4811,1037 4949,899 4977,899 5908,899 5934,873 5934,752 5907,725 5375,725 4888,725 4843,680 4743,680 4612,549 4494,549 4441,549 4348,549 4334,563 4285,563 4192,563 4110,563 3739,563 3337,563 3314,586 3286,614 3286,678 3303.24,695.24 3313,695.24 3933.76,695.24
  text "3" at 522,2085 h100

## Silkscreen, mask and mechanical layers (free items; w line width, h text height)
TopOverlay:
  lines w3.94: 4200,1900 5600,1900 ; 4200,1950 5600,1950 ; 4200,2050 5600,2050 ; 4400,1800 4400,2100 ; 4600,1800 4600,2100 ; 4800,1800 4800,2100 ; 4842.71,788.84 5398.71,788.84 5398.71,685.39 4842.71,685.39 4842.71,891.84 ; 4842.71,892 5273.71,892 5273.71,685.55 ; 4973.46,862.71 4973.46,892 ; 4973.71,685.84 4973.71,715.13 ; 4973.71,775.56 4973.71,804.84 ; 5000,1800 5000,2100 ; 5090.71,685.39 5090.71,891.84 ; 5186.46,862.26 5186.46,891.55 ; 5186.71,685.39 5186.71,714.68 ; 5186.71,774.56 5186.71,803.84 ; 5200,1800 5200,2100 ; 5400,1800 5400,2100 ; 4200,1800 4200,2100 5600,2100 5600,1800 4200,1800
  text "Rx" at 4855,2258 h30
  text "Tx" at 4952,2258 h30
  text "GND" at 4738,2257 h30
  text "DIO" at 5736,2070 h30 r270
  text "CLK" at 5737,1971 h30 r270
  text "GND" at 5737,1871 h30 r270
  text "+PWRLED-" at 4849.71,823.84 h30
  text "PWRSW" at 5105.71,819.84 h30
  text "+HDDLED-" at 4853.71,729.84 h30
  text "RSTSW" at 5112.71,722.84 h30
TopSolder:
  rectangle: 1312.99,177.17 1627.95,312.99
  rectangle: 269,2075 635,2195
BottomSolder:
  rectangle: 1312.99,177.17 1627.95,312.99
  rectangle: 269,2075 635,2195
  text "IPMI_TU Rev 1.1" at 6333,1161 h40 r90
PCI-SIG Notes:
  text "- Nominal values used, dimensions in mm" at 6771.65,738.19 h60
  text "- The mounting holes and keep-out areas around them are only required when the I/O bracket is mounted on the card directly" at 6771.65,688.98 h60
  text "- Component height rule and clearance rule derived from PCI_Express_CEM_r2.0.pdf, Page 84." at 6771.65,639.76 h60
  text "- Stackup is not specified in PCI_Express_CEM_r2.0.pdf, nor implemented in this template." at 6771.65,590.55 h60
Mechanical7:
  lines w3.94: 0,177.17 0,541.34 1771.65,541.34 1771.65,430.12 ccw(c1699.8,430.12) 1627.95,430.12 1627.95,312.99 1312.99,312.99 1312.99,501.97 590.55,501.97 590.55,177.17 0,177.17
DrillDrawing:
  text ".LEGEND" at 8868.11,2336.69 h39.37
  text "Drilling Details." at 8868.11,2264.69 h39.37

## Dimensions
0,0 to 0,2712.6 on PCI-SIG Dimensions
0,177.17 to 0,2712.6 on PCI-SIG Dimensions
0,2712.6 to 836.61,2509.84 on PCI-SIG Dimensions
1312.99,501.97 to 1112.2,1257.87 on PCI-SIG Dimensions

## Text inside footprints (layer, text, board x,y; h text height)
FPIO: TopOverlay "10" at 5160,1153 h50; TopOverlay "9" at 5160,1053 h50; TopOverlay "1" at 4620,1053 h50; TopOverlay "2" at 4600,1153 h50
J0: TopOverlay "H=13.50" at 276.07,765.51 h31.5 r90; TopOverlay "Y" at 111.07,775.51 h31.5 r90; TopOverlay "G" at 111.07,1000.51 h31.5 r90
MAINBRD_COM: TopOverlay "2" at 2500,1153 h50; TopOverlay "1" at 2520,1053 h50; TopOverlay "9" at 3060,1053 h50; TopOverlay "10" at 3060,1153 h50
MAINBRD_FPIO: TopOverlay "10" at 4460,1153 h50; TopOverlay "9" at 4460,1053 h50; TopOverlay "1" at 3920,1053 h50; TopOverlay "2" at 3900,1153 h50
MAINBRD_USB: TopOverlay "10" at 3760,1153 h50; TopOverlay "9" at 3760,1053 h50; TopOverlay "1" at 3220,1053 h50; TopOverlay "2" at 3200,1153 h50